# EAGLE board big_8x16 (EAGLE 6.2)
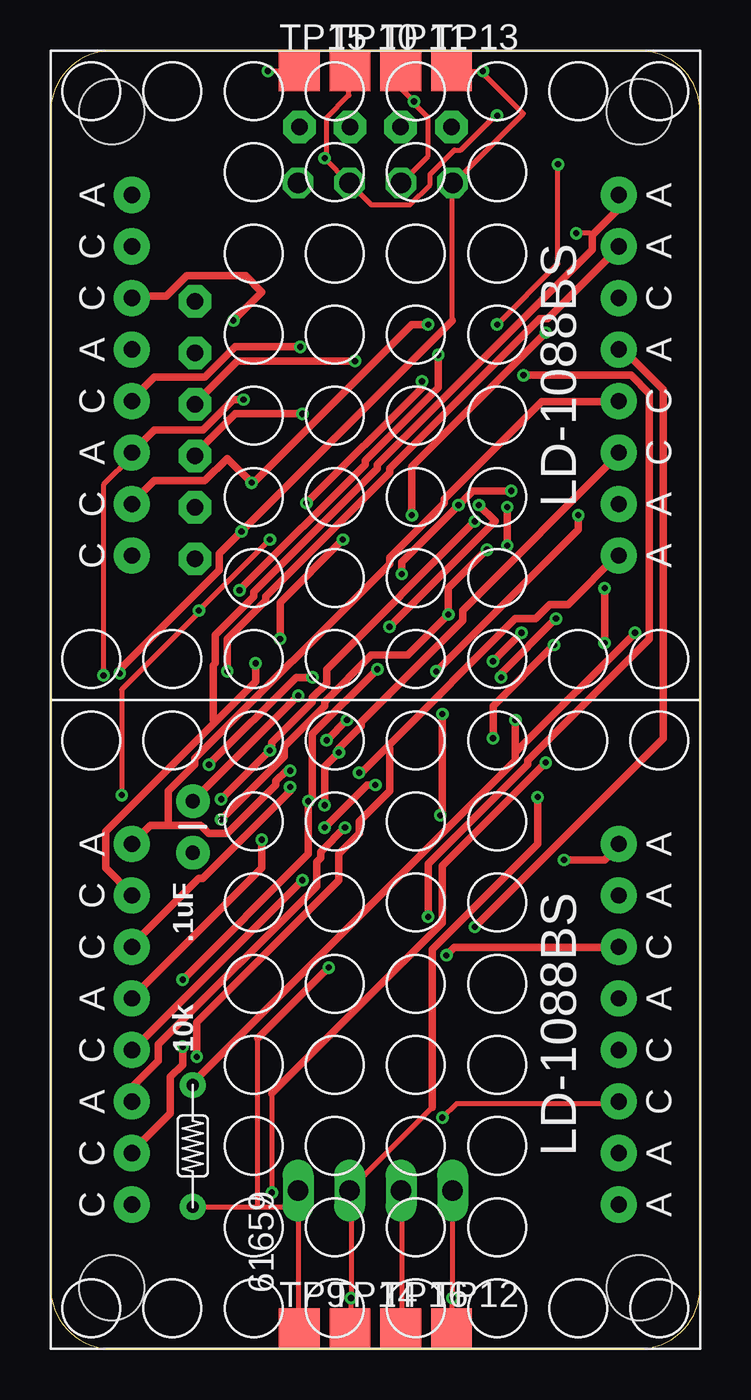
[diagram p0: board, top side]
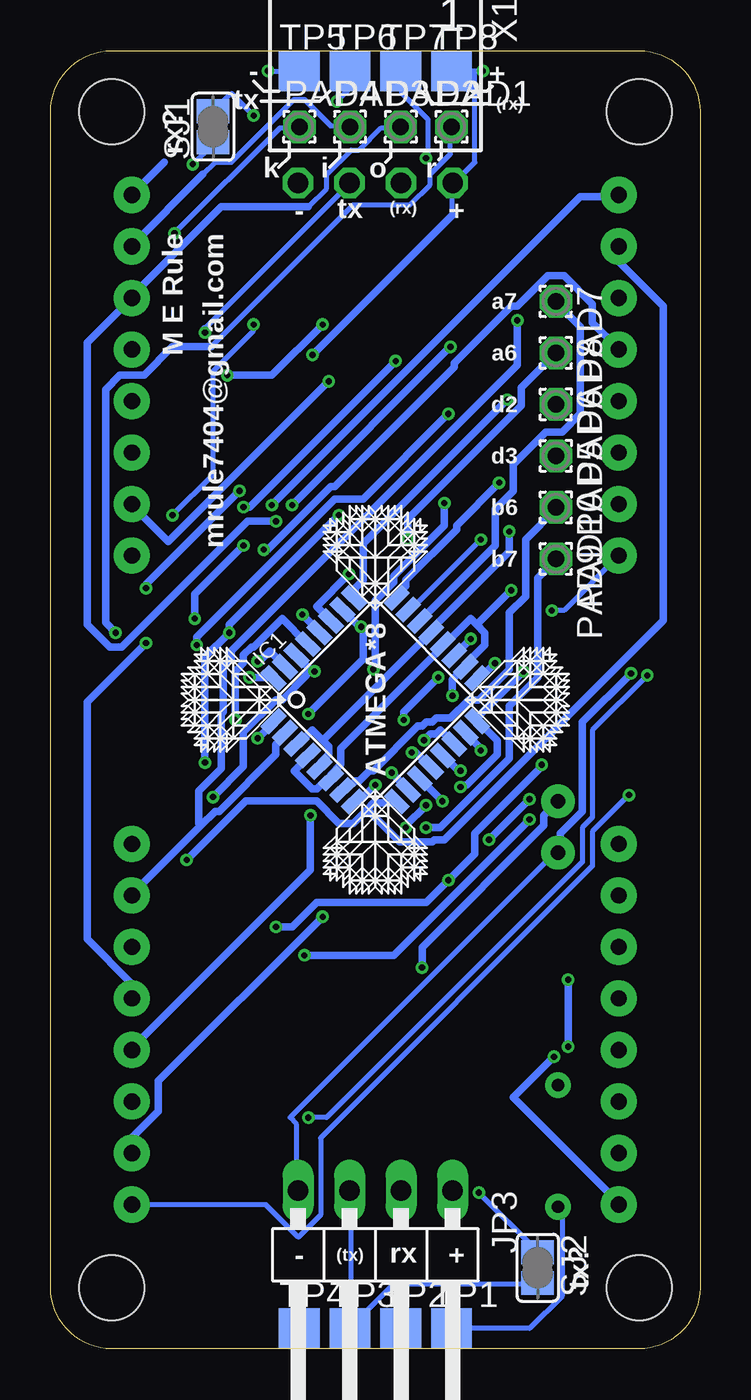
[diagram p1: board, bottom side, seen from below]

Size 32 x 64 mm. Coordinates in mm from the lower left corner, seen from the top.
Outline: 0,61 0,3 arc90 3,0 29,0 arc90 32,3 32,61 arc90 29,64 3,64 arc90 0,61
Copper layers (1*16): Top 0.035mm / dielectric 1.5mm / Bottom 0.035mm
Design rules: minimum track width 10mil, minimum drill 12mil, track to track 7mil, track to pad 7mil, pad to pad 7mil, via to via 7mil, smd to smd 0mil, copper to edge 10mil, drill to drill 10mil, minimum pad ring 10mil, minimum via ring 6mil, stop-mask expansion 2mil, vias tented up to drill 100mil, thermal gap 10mil
Holes 3.2 mm at 3,61 29,61 3,3 29,3

## Footprints (pad centres in the part's own frame; a part is rotated, then mirrored left to right if it is on the bottom)
CAP-PTH-SMALL = drill 0.7 pad 1.651: 1 0,0; 2 2.54,0
TQFP32-08 = smd 1.27 x 0.559: 1 -4.293,2.8; 2 -4.293,2; 3 -4.293,1.2; 4 -4.293,0.4; 5 -4.293,-0.4; 6 -4.293,-1.2; 7 -4.293,-2; 8 -4.293,-2.8; 17 4.293,-2.8; 18 4.293,-2; 19 4.293,-1.2; 20 4.293,-0.4; 21 4.293,0.4; 22 4.293,1.2; 23 4.293,2; 24 4.293,2.8 | smd 0.559 x 1.27: 9 -2.8,-4.293; 10 -2,-4.293; 11 -1.2,-4.293; 12 -0.4,-4.293; 13 0.4,-4.293; 14 1.2,-4.293; 15 2,-4.293; 16 2.8,-4.293; 25 2.8,4.293; 26 2,4.293; 27 1.2,4.293; 28 0.4,4.293; 29 -0.4,4.293; 30 -1.2,4.293; 31 -2,4.293; 32 -2.8,4.293
1X04/90 = drill 1.016 long: 1 -3.81,-3.81; 2 -1.27,-3.81; 3 1.27,-3.81; 4 3.81,-3.81
1,6/0,8 = drill 0.813 pad 1.6 octagon: 1 0,0
SJ = smd 1.168 x 1.6: 1 -0.762,0; 2 0.762,0
TP20SQ = smd 2 x 2: TP 0,0
LD-1088BS = drill 0.8 pad 1.778: A1 8.89,12; A2 1.27,12; A3 -3.81,12; A4 8.89,-12; A5 6.35,-12; A6 1.27,-12; A7 -6.35,-12; A8 -8.89,-12; C1 6.35,12; C2 3.81,12; C3 -1.27,12; C4 -6.35,12; C5 -8.89,12; C6 3.81,-12; C7 -1.27,-12; C8 -3.81,-12
R-6 = drill 0.6 pad 1.27: P$1 -3,0; P$2 3,0
SSW-104-02-S-S-RA = drill 1 pad 1.5 octagon: 1 -3.81,1.524; 2 -1.27,1.524; 3 1.27,1.524; 4 3.81,1.524

## Placement (x,y rotation side)
C1  [CAP-PTH-SMALL]  7,27 270 top
IC1  MEGA8-AI  [TQFP32-08]  16,32 45 bottom
JP3  [1X04/90]  16,4 180 bottom
PAD1  [1,6/0,8]  12.25,60.25 0 bottom
PAD2  [1,6/0,8]  14.75,60.25 0 bottom
PAD3  [1,6/0,8]  17.25,60.25 0 bottom
PAD4  [1,6/0,8]  19.75,60.25 0 bottom
PAD5  [1,6/0,8]  7.1,44.02 270 bottom
PAD6  [1,6/0,8]  7.1,46.56 270 bottom
PAD7  [1,6/0,8]  7.1,51.64 270 bottom
PAD8  [1,6/0,8]  7.1,49.1 270 bottom
PAD9  [1,6/0,8]  7.1,38.94 270 bottom
PAD10  [1,6/0,8]  7.1,41.48 270 bottom
SJ1  [SJ]  24,60.25 90 bottom
SJ2  [SJ]  8,4 270 bottom
TP1  TPSQTP20SQ  [TP20SQ]  12.25,1 0 bottom
TP2  TPSQTP20SQ  [TP20SQ]  14.75,1 0 bottom
TP3  TPSQTP20SQ  [TP20SQ]  17.25,1 0 bottom
TP4  TPSQTP20SQ  [TP20SQ]  19.75,1 0 bottom
TP5  TPSQTP20SQ  [TP20SQ]  19.75,63 0 bottom
TP6  TPSQTP20SQ  [TP20SQ]  17.25,63 0 bottom
TP7  TPSQTP20SQ  [TP20SQ]  14.75,63 0 bottom
TP8  TPSQTP20SQ  [TP20SQ]  12.25,63 0 bottom
TP9  TPSQTP20SQ  [TP20SQ]  12.25,1 0 top
TP10  TPSQTP20SQ  [TP20SQ]  14.75,63 0 top
TP11  TPSQTP20SQ  [TP20SQ]  17.25,63 0 top
TP12  TPSQTP20SQ  [TP20SQ]  19.75,1 0 top
TP13  TPSQTP20SQ  [TP20SQ]  19.75,63 0 top
TP14  TPSQTP20SQ  [TP20SQ]  14.75,1 0 top
TP15  TPSQTP20SQ  [TP20SQ]  12.25,63 0 top
TP16  TPSQTP20SQ  [TP20SQ]  17.25,1 0 top
U$1  LD-1088BS  [LD-1088BS]  16,16 90 top
U$2  LD-1088BS  [LD-1088BS]  16,48 90 top
U$3  R-6  [R-6]  7,10 270 top
U$5  [LOGO]  16,39 0 bottom
U$6  [LOGO]  9,32 270 bottom
U$7  [LOGO]  16,25 180 bottom
U$8  [LOGO]  23,32 90 bottom
X1  SSW-104-02-S-S-RA  [SSW-104-02-S-S-RA]  16,59 180 bottom

## Library data of the parts
C1 = SparkFun
IC1 = atmel; MPN: ATMEGA8-16AU; OC_FARNELL: 9171371; OC_NEWARK: 73M8863
JP3 = pinhead
PAD1-PAD10 = wirepad
SJ1 SJ2 = jumper
TP1-TP16 = testpad
U$1-U$3 = mrule
U$5-U$8 = mrule2
X1 = con-samtec; MPN: SSW-104-02-S-S-RA; OC_FARNELL: unknown; OC_NEWARK: 11P9385

## Nets
N$1: IC1.24 U$1.A7 U$2.C4
N$2: IC1.25 U$1.C8 U$2.A3
N$3: IC1.26 U$1.C7 U$2.A1
N$4: IC1.27 U$1.A6 U$2.C3
N$5: IC1.28 U$1.C6 U$2.A2
N$6: IC1.2 U$1.A5 U$2.C2
N$7: IC1.9 U$1.A4 U$2.C1
N$8: IC1.15 PAD2.1 U$1.A2 U$2.C6
N$9: IC1.14 U$1.C3 U$2.A6
N$10: IC1.13 U$1.A1 U$2.C7
N$11: IC1.12 U$1.A3 U$2.C8
N$12: IC1.11 U$1.C4 U$2.A7
N$13: IC1.10 U$1.C5 U$2.A8
N$14: IC1.16 PAD3.1 U$1.C2 U$2.A5
N$15: IC1.17 PAD4.1 U$1.C1 U$2.A4
N$16: IC1.1 PAD5.1
N$17: IC1.23 U$1.A8 U$2.C5
N$18: C1.2 IC1.3 IC1.5 IC1.21 JP3.4 TP4.TP TP5.TP TP12.TP TP13.TP X1.4
N$19: C1.1 IC1.4 IC1.6 IC1.18 IC1.20 JP3.1 TP1.TP TP8.TP TP9.TP TP15.TP U$3.P$2 X1.1
N$20: IC1.32 PAD6.1
N$21: SJ1.2 TP7.TP TP10.TP X1.2
N$22: JP3.3 SJ2.2 TP3.TP TP16.TP
N$23: IC1.31 SJ2.1 TP6.TP TP11.TP X1.3
N$24: IC1.30 JP3.2 SJ1.1 TP2.TP TP14.TP
N$25: IC1.29 PAD1.1 U$3.P$1
N$26: IC1.22 PAD7.1
N$27: IC1.19 PAD8.1
N$28: IC1.8 PAD9.1
N$29: IC1.7 PAD10.1

## Tracks (layer width: path | path; a pad name or v marks a point on that pad's centre or on a via)
N$1  (via drill 0.3)
  Top 0.381: U$2.C4 4,41.7 5.1,42.8 7.6,42.8 8.7,43.9 v9.9,42.7 10,42.7 17.8,50.5 v18.6,50.5 | v18.6,21.3 18.6,23.9 23.5,28.8 23.5,29 29.5,35 29.5,47.1 28.6,48 v23.3,48
  Bottom 0.381: v9.9,42.7 12,40.6 12,40.4 14.5,37.9 14.5,37.6 14.9,37.2 14.9,37.1 IC1.24 | U$1.A7 28,10.4 26.7,11.7 26.7,13.2 v18.6,21.3 | v23.3,48 21.1,48 v18.6,50.5
N$2  (via drill 0.3)
  Top 0.254: v19.3,11.4 20,12.1 28,12.1 U$1.C8 | v2.6,33.2 2.6,42.6 4,44 U$2.A3
  Top 0.381: v9.5,46.8 9,46.8 7.5,45.3 5.1,45.3 U$2.A3
  Bottom 0.254: v19.3,11.4 18.4,11.4 5.8,24 5.8,25.7 5.3,26.2 5.3,30.5 v2.6,33.2
  Bottom 0.381: v9.5,46.8 16.6,39.7 16.6,37.9 17,37.5 17,37.1 IC1.25
N$3  (via drill 0.3)
  Top 0.381: v19.3,31.3 19.3,26.4 v19.2,26.3 | v21.1,41.6 21.9,40.8 v16.7,35.6
  Bottom 0.381: 16.75,35.55 16.6,35.4 16.6,34 v19.3,31.3 | 16.75,35.55 17.6,36.4 IC1.26 | v19.2,26.3 19.2,23.6 28,14.8 U$1.C7 | v21.1,41.6 5.9,56.8 4,56.8 U$2.A1 | v16.7,35.6 16.75,35.55
N$4  (via drill 0.3)
  Top 0.381: v17.3,38.2 17.3,38.8 v20.1,41.6 20.8,42.3 v22.7,42.3 | v12.3,49.4 9.1,49.4 7.6,47.9 5.1,47.9 4,46.8 U$2.C3 | v27.3,37.5 v27.3,34.8
  Bottom 0.381: v17.3,38.2 18.9,36.6 18.2,35.9 IC1.27 | v12.3,49.4 v20.1,41.6 | U$1.A6 28,18 30.2,20.2 30.2,31.9 v27.3,34.8 | v27.3,37.5 27.3,37.7 v22.7,42.3
N$5  (via drill 0.3)
  Top 0.381: v21.5,39.4 19.6,37.5 v19.6,36.2 17.6,34.2 15.8,34.2 13.5,31.9 13.5,31.7 11.5,29.7 11.5,29.2 v8.4,26.1 | v19.5,19.4 19.9,19.8 U$1.C6
  Bottom 0.381: v19.6,36.2 18.8,35.4 IC1.28 | v21.5,39.4 21.3,39.4 18.2,42.5 18,42.5 12.1,48.4 12.1,48.6 9.3,51.4 9,51.4 7.5,52.9 6.7,52.9 5.3,51.5 5.3,50.6 4,49.3 U$2.A2 | v19.5,19.4 15.1,19.4 v8.4,26.1
N$6  (via drill 0.3)
  Top 0.381: v9,50.7 10.4,52.1 9.6,52.9 6.7,52.9 5.7,51.9 4,51.9 U$2.C2
  Bottom 0.381: 24.6,25.8 28,22.4 U$1.A5 | 24.6,25.8 23.9,26.5 23.7,26.5 20.9,29.3 20.9,29.8 20.5,30.2 20.5,30.3 IC1.2 | v9,50.7 9,48.5 23.1,34.4 23.1,34 23.5,33.6 23.5,31.4 23.6,31.3 23.6,28.6 24.7,27.5 24.7,25.9 24.6,25.8
N$7  (via drill 0.3)
  Top 0.381: v25.3,24.1 27.3,24.1 28,24.8 U$1.A4
  Bottom 0.381: 16.4,26.6 17.1,25.9 17.8,25.9 18.9,27 22.4,27 v25.3,24.1 | 16.4,26.6 16.1,26.9 15,26.9 IC1.9 | U$2.C1 4,53.6 1.8,51.4 1.8,35.9 12.6,25.1 13.1,25.1 13.2,25 14.8,25 16.4,26.6
N$8  (via drill 0.3)
  Top 0.381: v8.4,27.1 v10.8,29.5 10.9,29.6 10.9,29.9 12.9,31.9 12.9,32.1 13.6,32.8 13.6,33.5 v20.9,40.8 | v10.4,25.1 10.4,23.7 4,17.3 U$1.A2
  Bottom 0.254: 19.3,56.3 18.4,57.2 18.4,57.9 17.2,59.1 16.8,59.1 15.7,60.2 14.8,60.2 PAD2.1
  Bottom 0.381: v10.8,29.5 10.8,29.6 11.5,30.3 IC1.15 | v10.4,25.1 v8.4,27.1 | 19.3,56.3 23.6,56.3 28,51.9 U$2.C6 28.1,51.7 30.2,49.6 30.2,35.7 29.1,34.6 28.5,34.6 22.3,40.8 v20.9,40.8
N$9  (via drill 0.3)
  Top 0.381: v14.6,31 v13.6,30 | v12.9,33.1 12.1,33.1 v7.8,28.8 | v12.4,23.1 4,14.7 U$1.C3 | v20.9,20.8 30.2,30.1 30.2,47.3 28.3,49.2 28,49.2 U$2.A6
  Bottom 0.381: v13.6,30 13.3,30.3 13,30.3 12.8,30.5 12.2,29.9 IC1.14 | v14.6,31 14.6,31.4 v12.9,33.1 | v7.8,28.8 7.8,28.7 11.1,25.4 11.1,24.4 v12.4,23.1 13.5,22 18.9,22 20.1,20.8 v20.9,20.8
N$10  (via drill 0.3)
  Top 0.381: v11.8,28.5 11.6,28.5 11.1,28 11.1,27.8 8.7,25.4 7.8,25.4 7.4,25.8 5.8,25.8 | 5.8,25.8 4.9,25.8 U$1.A1 | 5.8,25.8 5.8,27.5 7.1,28.8 7.1,29.1 16.7,38.7 16.7,39 19.4,41.7 19.4,41.9 24.2,46.7 28,46.7 U$2.C7
  Bottom 0.381: v11.8,28.5 11.9,28.5 12.6,29.2 IC1.13
N$11  (via drill 0.3)
  Top 0.381: U$2.C8 28,44.1 20.3,36.4 20.3,35.9 15.3,30.9 15.3,30.7 14.2,29.6 v14.2,29.4 13.5,28.7 v13.5,26.8 | U$1.A3 4,12.9 5.3,14.2 5.3,15 13.1,22.8 13.1,24 13.3,24.2 13.3,24.5 v14.5,25.7
  Bottom 0.381: v14.2,29.4 14.1,29.5 13.3,28.7 IC1.12 | v14.5,25.7 14.5,25.8 v13.5,26.8
N$12  (via drill 0.3)
  Top 0.381: v6.5,18.2 12.7,24.4 v12.7,27 12.9,27.2 12.9,30.3 v16.1,33.5 | v6.5,14.9 6.5,14 5.9,13.4 5.9,11.6 4,9.7 U$1.C4 | v18.3,47.7 18.3,47.4 v12.6,41.7
  Bottom 0.381: v12.7,27 13.8,28.1 IC1.11 | v6.5,14.9 v6.5,18.2 | v18.3,47.7 26.2,39.8 28,41.6 U$2.A7 | v12.6,41.7 12.6,40.6 15.1,38.1 15.1,37.8 16,36.9 16,33.6 v16.1,33.5
N$13  (via drill 0.3)
  Top 0.381: v15.2,28.4 15.3,28.4 16.6,29.7 | 16.6,29.7 22.9,36 23.9,36 24.6,36.7 25.5,36.7 28,39.2 U$2.A8 | v7.2,14.4 7.2,16.1 14.2,23.1 14.2,24.4 15.2,25.4 15.2,26 16.7,27.5 16.7,29.6 16.6,29.7
  Bottom 0.254: U$1.C5 4,7.2
  Bottom 0.381: v15.2,28.4 14.4,27.6 IC1.10 | 4,7.2 9.2,12.4 v7.2,14.4
N$14  (via drill 0.3)
  Top 0.381: v11.8,27.7 11.8,27.5 7.5,23.2 7.3,23.2 4,19.9 U$1.C2 | v8.7,33.4 8.7,35 10.6,36.9 10.6,37.1 16.7,43.2 16.7,43.4 24.1,50.8 24.5,50.8 28,54.3 U$2.A5
  Bottom 0.254: 24.5,57.9 23.9,58.5 23.1,58.5 20,61.6 19.5,61.6 18.2,60.3 17.3,60.3 PAD3.1
  Bottom 0.381: v11.8,27.7 11.7,27.8 11.5,27.8 10,29.3 10,30 10.9,30.9 IC1.16 10.9,31.1 10.9,31.2 v8.7,33.4 | 24.5,57.9 28,54.4 U$2.A5
N$15  (via drill 0.3)
  Top 0.254: v25.9,55 26.6,55 26.7,54.9
  Top 0.381: v10.1,33.8 10.1,32.9 8.1,30.9 | 8.1,30.9 2.7,25.5 2.7,23.7 4,22.4 U$1.C1 | U$2.A4 28,56.2 26.7,54.9 26.7,54.2 16.1,43.6 16.1,43.4 10,37.3 10,37.1 8.1,35.2 8.1,33.8 8,33.7 8,31 8.1,30.9
  Bottom 0.254: v25.9,55 20.7,60.2 19.8,60.2 PAD4.1
  Bottom 0.381: 26.4,58.5 U$2.A4 | v10.1,33.8 10.8,33.1 10.9,33.1 IC1.17
N$16  (via drill 0.3)
  Top 0.381: v21.8,30.1 21.8,31.7 v24.8,34.7 | v12.4,46.1 9.1,46.1 7.1,44.1 PAD5.1
  Bottom 0.381: v21.8,30.1 21.1,30.8 21.1,30.9 IC1.1 | v24.8,34.7 24.8,35.1 18,41.9 16.6,41.9 v12.4,46.1
N$17  (via drill 0.3)
  Top 0.254: v10.8,39.9 v7.3,36.4 7.3,36.3 3.5,32.5 v3.5,27.3
  Bottom 0.254: v10.8,39.9 14.2,36.5 14.3,36.5 IC1.23 | v7.3,36.4 6.7,36.4 U$2.C5 | v3.5,27.3 5.3,25.5 5.3,23.8 18.7,10.4 18.7,6.6 19.8,5.5 21.4,7.1 U$1.A8
N$18  (via drill 0.3)
  Top 0.254: 19.8,1 TP12.TP 19.8,1.1 v19.8,2.5 JP3.4 | TP13.TP v21.3,63 21.3,62.9 23.3,60.9 19.9,57.5 X1.4 19.8,57.4 19.8,50.7
  Top 0.381: 19.8,50.7 v9.4,40.3 8.3,39.2 8.3,38.4 3.4,33.5 v3.4,33.3
  Bottom 0.254: 19.8,1 TP12.TP 19.8,1.1 v19.8,2.5 | v21.3,63 TP13.TP | JP3.4 19.9,7.9 19.9,11.1 20.2,11.4 7.1,24.5 C1.2
  Bottom 0.381: 18.6,30 19.1,30.5 19.8,29.8 IC1.3 | 18.6,30 18.3,29.7 18.3,29.3 18.7,28.9 18.7,28.7 IC1.5 | 18.6,30 13.3,35.3 IC1.21 13.2,35.5 9.4,39.3 v9.4,40.3 | v3.4,33.3 5.8,30.9 5.8,26.5 6.9,25.4 6.9,24.6 C1.2
N$19  (via drill 0.3)
  Top 0.254: 12.3,1 TP9.TP 12.2,1.1 JP3.1 12.1,7 10.2,7 | TP15.TP v10.7,63 | U$3.P$2 10.2,7 | 10.2,7 10.2,15.3
  Top 0.381: v19.1,49 19.1,47.4 15.5,43.8 15.5,43.6 v9.3,37.4 | v12.2,32.2 C1.1 | v13.7,18.8 10.2,15.3
  Bottom 0.254: v10.7,63 11.1,63 | 11.1,63 TP15.TP | 11.1,63 11.1,58.5 12.1,57.5 X1.1 12.2,57.4 12.2,55.9 | TP9.TP 8.4,1 6.8,2.6 6.8,6.8 U$3.P$2
  Bottom 0.381: IC1.4 19.3,29.2 20,28.5 19.1,27.6 18.9,27.6 18.4,28.1 18.2,28.1 IC1.6 18.2,28.3 17.7,28.8 17.7,29.6 12.7,34.6 IC1.20 12.6,34.7 11.3,36 11,35.7 | 11,35.7 10.6,35.3 10.6,34.7 11.5,33.8 11.5,33.7 IC1.18 11.7,33.5 12.2,33 v12.2,32.2 | v19.1,49 12.2,55.9 | 11,35.7 v9.3,37.4 | v13.7,18.8 13.7,19.8 7.7,25.8 7.7,26.3 C1.1
N$20  (via drill 0.3)
  Top 0.381: v22.2,33.1 22.2,33.3 v24.9,36 | v22.5,41.5 v22.5,39.6 | v15,48.7 9.2,48.7 7.1,46.6 PAD6.1
  Bottom 0.381: v22.2,33.1 21.1,33.1 IC1.32 | v24.9,36 24.9,37.2 v22.5,39.6 | v22.5,41.5 22.2,41.5 v15,48.7
N$21  (via drill 0.3)
  Top 0.254: v22,60.8 21.9,60.8 20.2,59.1 19.9,59.1 18.7,57.9 18.7,57.4 17.7,56.4 15.8,56.4 14.8,57.4 X1.2 14.7,57.5 v13.5,58.7 13.5,58.8 13.6,58.9 13.6,60.7 14.7,61.8 14.7,63 TP10.TP
  Bottom 0.254: v22,60.8 23.1,61.9 SJ1.2 | v13.5,58.7 13.4,58.8 13.4,60.6 14.7,61.9 14.7,63 TP10.TP
N$22
  Top 0.254: 17.3,1 TP16.TP 17.3,1.1 17.3,7.8 JP3.3
  Bottom 0.254: 17.2,1 TP16.TP | SJ2.2 8,3.2 15.1,3.2 17.2,1.1 TP16.TP | JP3.3 17.2,7.8 17.2,1.2 TP16.TP
N$23  (via drill 0.3)
  Top 0.254: 10.9,12.6 v10.9,7.7 | TP11.TP 17.2,63 16.8,62.6 v17.9,61.5 17.9,61.4 18.6,60.7 18.6,58.8 17.3,57.5 X1.3
  Top 0.381: v23.2,35.3 v21.8,33.9 | v17.8,41.1 17.8,43.5 v24.4,50.1 | 10.9,12.6 19.3,21 19.3,23.8 v24.4,28.9
  Bottom 0.254: v10.9,7.7 8,4.8 SJ2.1 | v17.9,61.5 17.3,62.1 17.3,63 TP11.TP | v24.4,50.1 24.3,50.4 17.3,57.4 X1.3
  Bottom 0.381: v21.8,33.9 21.7,33.9 21.2,34.4 20.5,33.7 IC1.31 | v17.8,41.1 23.2,35.7 v23.2,35.3 24.4,34.1 v24.4,28.9 | 24.4,50.3 v24.4,50.1
N$24  (via drill 0.3)
  Top 0.254: 14.8,1 TP14.TP 14.8,1.1 v14.8,2.5 14.8,7.8 JP3.2 14.8,7.9 18.8,11.9 | v25,58.4 25,53.5 v22,50.5
  Top 0.381: v24,27.2 24,24.9 18.8,19.7 18.8,11.9 | v26,41.1 26,40.4 v19,33.4
  Bottom 0.254: 14.8,1 TP14.TP 14.8,1.1 v14.8,2.5 | v25,58.4 24,59.4 SJ1.1 | v22,50.5 22,50.2 24,48.2 24,43.1 v26,41.1
  Bottom 0.381: 19.2,33.5 19.8,34.1 IC1.30 | 19.2,33.5 19.4,33.3 19.4,33.2 20.6,32 20.9,32 22.5,30.4 22.5,28.7 v24,27.2 | v19,33.4 19.1,33.4 19.2,33.5
N$25  (via drill 0.3)
  Top 0.381: 22.9,29.5 22.9,29 7,13.1 U$3.P$1 | 22.9,29.5 v22.9,31 | v28.8,35.3 23,29.5 22.9,29.5
  Bottom 0.254: 24.1,49.4 17.1,56.4 14.3,56.4 13.3,57.4 13.3,57.9 12.3,58.9 12.3,60.2 PAD1.1
  Bottom 0.381: v22.9,31 22.9,33.4 22.5,33.8 22.5,34.2 22.1,34.6 22,34.6 20.6,36 19.4,34.8 IC1.29 | 24.1,49.4 26,49.4 27.4,48 28.6,48 29.3,47.3 29.3,35.8 v28.8,35.3
N$26
  Bottom 0.381: IC1.22 13.8,35.9 10.1,39.6 10.1,41.4 9.2,42.3 9.2,43.6 7.6,45.2 6.8,45.2 5.9,46.1 5.9,50.4 7.1,51.6 PAD7.1
N$27  (via drill 0.3)
  Top 0.381: v11.3,35 11.3,36.8 v14.4,39.9
  Bottom 0.381: v11.3,35 12.1,34.2 IC1.19 | v14.4,39.9 14.4,40.9 8.8,46.5 8.8,47.4 PAD8.1
N$28  (via drill 0.3)
  Top 0.381: v16,27.8 15.6,27.8 v13.5,25.7
  Bottom 0.381: v16,27.8 16.8,27 17,27 IC1.8 | v13.5,25.7 12.8,25.7 9.4,29.1 9.4,31.7 8,33.1 8,38 7.1,38.9 PAD9.1
N$29
  Bottom 0.381: IC1.7 17.6,27.6 17.4,27.6 17,28 16.8,28 16.3,28.5 16.1,28.5 13.9,30.7 13.7,30.7 13.5,30.9 13.2,30.9 13,31.1 12.3,31.1 11.4,32 10.9,32 9.4,33.5 9.4,36.3 8.6,37.1 8.6,39.9 7.1,41.4 PAD10.1

## Text on the board
tPlace: .1uF | 10k | 61659
bPlace: + | - | tx | (rx) | rx? | r | o | i | k | + | (rx) | tx | - | mrule7404@gmail.com | M E Rule | a7 | a6 | d2 | d3 | b6 | b7 | ATMEGA*8 | + | rx | (tx) | - | tx?